# Altium PCB PCB1.PcbDoc
Units mm, origin at the board's own origin, x right, y up, seen from the top; angles counter-clockwise.
Board outline 23 x 13.5 mm, 2 copper layers (L1(Signal), L2(GND)), stack 1.671 mm thick; 13 components, 11 nets, 39 pads, 8 vias.
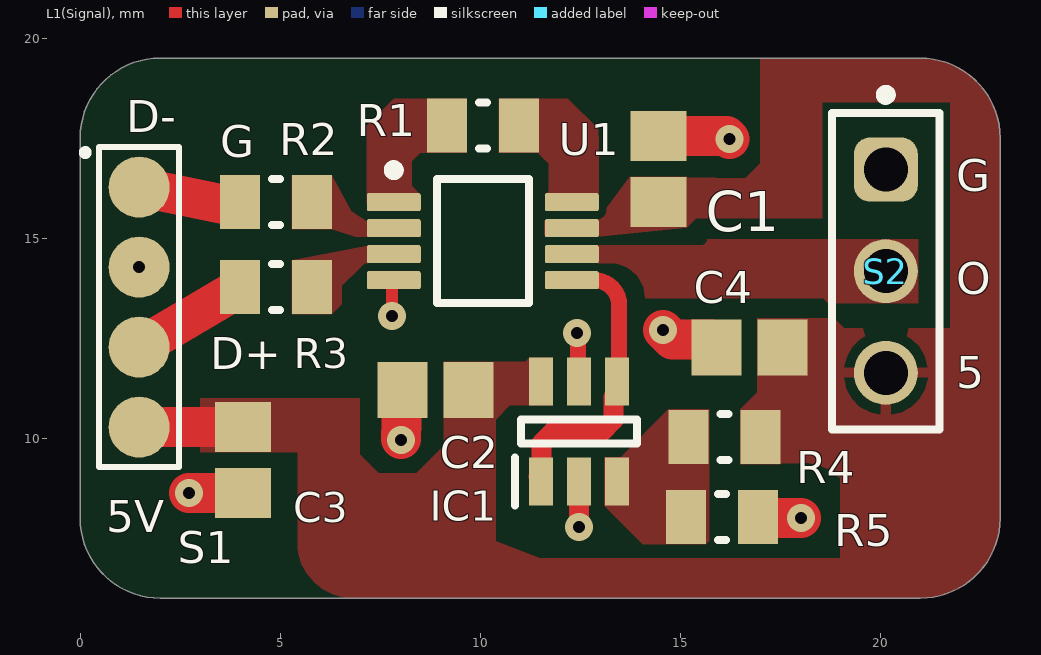
[diagram p0: L1(Signal) view]
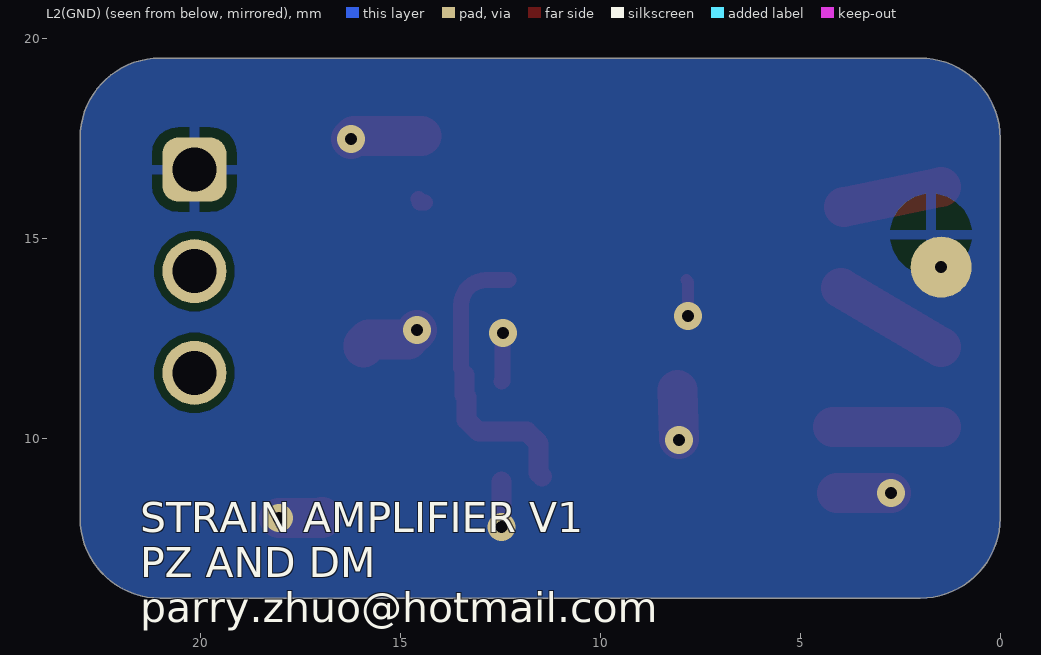
[diagram p1: L2(GND) view, seen from below]
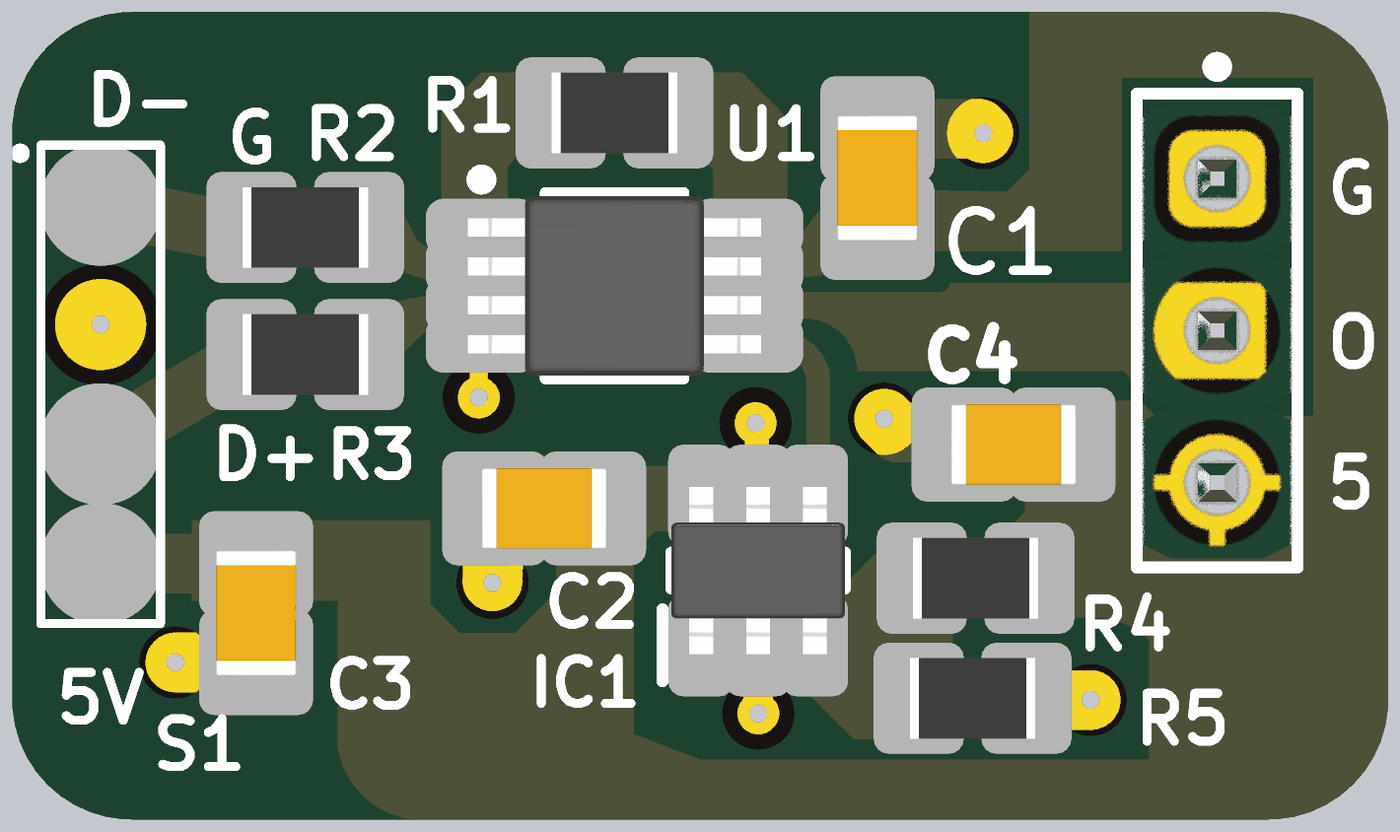
[diagram p2: 3D render of the assembled board from above, using the file's embedded part models]

## Layer stack, top to bottom
Top Solder: solder mask 0.0127, Solder Resist, Dk 3.3
L1(Signal): signal copper 0.0356
Dielectric1: core 1.6002, FR-4, Dk 4.3
L2(GND): signal copper 0.0356
Bottom Solder: solder mask 0.0127, Solder Resist, Dk 3.3

## Board outline
0,17.5 cw(c2,17.5) 2,19.5 21,19.5 cw(c21,17.5) 23,17.5 23,8 cw(c21,8) 21,6 2,6 cw(c2,8) 0,8

## Design rules (kind name [scope] priority, off if disabled: settings)
Clearance [All] p1: gap=0.2 ignorepadtopadclearanceinfootprint=TRUE except(0: Arc-Poly Track-Poly Via-Fill Via-Poly Fill-Fill Fill-Poly Poly-Poly)
DiffPairsRouting [All] p1: maxlimit=0.254 minlimit=0.254 mostfreqgap=0.254 toplayer_minwidth=0.254 toplayer_maxwidth=0.254 toplayer_prefwidth=0.254 bottomlayer_minwidth=0.254 bottomlayer_maxwidth=0.254 bottomlayer_prefwidth=0.254 maxuncoupledlength=12.7
HoleSize [All] p1: absolutevalues=TRUE maxlimit=7.62 minlimit=0.254 maxpercent=80.000 minpercent=20.000
MinimumAnnularRing [All] p1: minimumring=0.2
MinimumSolderMaskSliver [All] p1: minsoldermaskwidth=0.104
PasteMaskExpansion [All] p1: expansion=0.254
PlaneClearance [All] p1: clearance=0.381
PolygonConnect GND_Connection [InNet('GND') vs InNet('GND')] p1: thpad.connectstyle=Relief thpad.reliefconductorwidth=0.254 thpad.reliefentries=4 thpad.polygonreliefangle="90 Angle" thpad.airgapwidth=0.254 smdpad.connectstyle=Direct smdpad.reliefconductorwidth=0.254 smdpad.reliefentries=4 smdpad.polygonreliefangle="90 Angle" smdpad.airgapwidth=0.254 via.connectstyle=Direct via.reliefconductorwidth=0.254 via.reliefentries=4 via.polygonreliefangle="90 Angle" via.airgapwidth=0.254
PolygonConnect 5V_connection [InNet('+5')] p2: thpad.connectstyle=Relief thpad.reliefconductorwidth=0.254 thpad.reliefentries=4 thpad.polygonreliefangle="90 Angle" thpad.airgapwidth=0.254 smdpad.connectstyle=Direct smdpad.reliefconductorwidth=0.254 smdpad.reliefentries=4 smdpad.polygonreliefangle="90 Angle" smdpad.airgapwidth=0.254 via.connectstyle=Direct via.reliefconductorwidth=0.254 via.reliefentries=4 via.polygonreliefangle="90 Angle" via.airgapwidth=0.254
PolygonConnect [All] p3: connectstyle=Direct reliefconductorwidth=0.254 reliefentries=4 polygonreliefangle="90 Angle" airgapwidth=0.254
RoutingVias [All] p1: holewidth=0.5 width=0.7 viastyle="Through Hole" minholewidth=0.3 minwidth=0.5 maxholewidth=1.1 maxwidth=1.3
SMDNeckDown [All] p1: percent=100.000
SilkToSolderMaskClearance SilkscreenOverComponentPads [IsPad] p1: minsilkscreentomaskgap=0.1 clearancetoexposedcopper=TRUE
SolderMaskExpansion [All] p1: expansion=0.254 istentingtop=FALSE
SupplyNets "Schematic Supply Nets_1" [InNet('+5')] p1: voltage=0.000
SupplyNets "Schematic Supply Nets" [InNet('GND')] p2: voltage=0.000
UnRoutedNet [All] p1: checkbadconnections=TRUE
Width [All] p1: maxlimit=1 minlimit=0.2 preferedwidth=0.3 minimp=50.000000 maximp=50.000000 favimp=50.000000
23 further rules are at their usual default settings.

## Components (designator, comment, footprint, x,y, rotation, side; value= is the part's Value field where it differs from the comment)
C1 "0.1uF" CAP_0805 14.461,16.724 r90 top
C2 "0.1uF" CAP_0805 8.89,11.201 r180 top
C3 "0.1uF" CAP_0805 4.075,9.45 r90 top
C4 "0.1uF" CAP_0805 16.739,12.268 r0 top
IC1 "TLV9061SQDBVRQ1" SOT95P280X145-6N 12.468,10.162 r90 top
R1 "1k +-0.1%" RES_0805 10.067,17.814 r180 top
R2 "1K +-0.1%" RES_0805 4.896,15.899 r180 top
R3 "1K +-0.1%" RES_0805 4.896,13.773 r180 top
R4 "200K +-0.1%" RES_0805 16.104,10.033 r0 top
R5 "100K +-0.1%" RES_0805 16.053,8.026 r180 top
S1 "CONN_01X04_StrainGauge" CONN_01X04 1.475,16.275 r0 top
S2 "CONN_01X03_2.54MM" 61300311121 20.142,14.173 r270 top
U1 "INA333AIDGKR" DGK0008A_N 10.067,14.924 r0 top

## Footprints (in the part's own frame and the unit in brackets; to place one, negate y for a bottom-side part, rotate by r counter-clockwise, add the part's x,y. Pads: shape width x height; smd on the part's side, far side on the other; paste and mask are expansions set on the pad)
61300311121 [mm] "Pin Header, pitch 2.54 mm, THT, Vertical, single row, 3p"
  rrect50% 1.6x1.6 hole 1.1: 1(-2.54,0)
  round 1.6 hole 1.1: 2(0,0) 3(2.54,0)
  silkscreen extent -4.53,-1.35 3.96,1.35, body extent -3.81,-1.27 3.81,1.27, height 8.57
CAP_0805 [mm] "Chip Capacitor, 2-Leads, Body 2.00x1.25mm, IPC Medium Density"
  rect 1.25x1.4 smd: 1(-0.825,0) 2(0.825,0)
  body extent -1.05,-0.67 1.05,0.67, height 1.35
CONN_01X04 [mil]
  round 60 smd: 1(0,0) 3(0,-157.48) 4(0,-236.22)
  round 60 hole 11.81: 2(0,-78.74)
  silkscreen extent -54,-276 39,39
DGK0008A_N [mm] "TSOP, 8-Leads, Body 3.1x3.1mm, Pitch 0.65mm, IPC Medium Density"
  rrect22% 1.35x0.45 smd: 1(-2.225,0.975) 2(-2.225,0.325) 3(-2.225,-0.325) 4(-2.225,-0.975) 5(2.225,-0.975) 6(2.225,-0.325) 7(2.225,0.325) 8(2.225,0.975)
  silkscreen extent -2.35,-1.55 1.15,1.9, body extent -2.45,-1.5 2.45,1.5, height 0.94
RES_0805 [mm] "Chip Resistor, 2-Leads, Body 2.00x1.25mm, IPC Medium Density"
  rect 1x1.35 smd: 1(-0.9,0) 2(0.9,0)
  silkscreen extent -0.1,-0.58 0.1,0.58, body extent -1.05,-0.67 1.05,0.67, height 0.6
SOT95P280X145-6N [mm]
  rect 1.2x0.6 smd: 1(-1.25,0.95) 2(-1.25,0) 3(-1.25,-0.95) 4(1.25,-0.95) 5(1.25,0) 6(1.25,0.95)
  silkscreen extent -1.85,-1.45 0.3,1.6, body extent -1.4,-1.45 1.4,1.45, height 1.2

## Part data
C1 C2 C3 C4: library part CAP_0805, "Generic 0805 component", Manufacturer=YAGEO, Manufacturer part number=CC0805JRNPO9BN250, voltage rating=50, Distributor link=https://www.digikey.ca/en/products/detail/yageo/CC0805JRNPO9BN250/5884044
IC1: "Integrated Circuit", Manufacturer_Name="Texas Instruments", Mouser Part Number=595-TLV9061SQDBVRQ1, Arrow Part Number=TLV9061SQDBVRQ1, Arrow Price/Stock=null?region=nac, Datasheet Link=https://www.ti.com/lit/gpn/tlv9061-q1, Height=1.45mm, Manufacturer_Part_Number=TLV9061SQDBVRQ1, Mouser Price/Stock=https://www.mouser.co.uk/ProductDetail/Texas-Instruments/TLV9061SQDBVRQ1?qs=DRkmTr78QASJ%252B5bCrdR4jA%3D%3D
R1 R2 R3: library part RES_0805, "RES_0805", Manufacturer="Stackpole Electronics Inc", Manufacturer part number=RNCS0805BKE1K00, Distributor link=https://www.digikey.ca/en/products/detail/stackpole-electronics-inc/RNCS0805BKE1K00/1800073
R4: library part RES_0805, "RES_0805", Manufacturer="KOA Speer Electronics, Inc.", Manufacturer part number=RN73R2ATTD2003B25, Distributor link=https://www.digikey.ca/en/products/detail/koa-speer-electronics-inc/RN73R2ATTD2003B25/10027580
R5: library part RES_0805, "RES_0805", Manufacturer="Stackpole Electronics Inc", Manufacturer part number=RNCS0805BKE100K, Distributor link=https://www.digikey.ca/en/products/detail/stackpole-electronics-inc/RNCS0805BKE100K/1800066
U1: library part CMP-0944-00088-2, "Low Power, Precision Instrumentation Amplifier, -40 to 125 degC, 8-pin SOP (DGK8), Green (RoHS & no Sb/Br)", Input Bias Current (+/-)(Max)(nA)=0.2, Manufacturer="Texas Instruments", Quiescent Current (+/-)(Typ)(mA)=0.05, CMRR(Min)(dB)=100, Code_JEDEC=MO-187, ComponentLink1Description="Manufacturer URL", ComponentLink1URL=http://www.ti.com/, ComponentLink2Description=Datasheet, ComponentLink2URL=http://www.ti.com/general/docs/lit/getliterature.tsp?genericPartNumber=INA333&fileType=pdf, ComponentLink3Description="Package Specification", ComponentLink3URL=http://www.ti.com/litv/pdf/mpds028d, DatasheetVersion=SBOS445B, Eco-Plan="Green (RoHS & no Sb/Br)", Gain(V/V)="1 to 1000", Input Offset (+/-)(Max)(uV)=25, Input Offset Drift (+/-)(Max)(uV/Degrees Celsius)=0.1, Mounting Technology="Surface Mount", Noise at 1kHz(Typ)(nV/rt(Hz))=50, Number of Channels=1, Output Offset (+/-)(Max)(uV)=75/G, Output Offset Drift (+/-)(Max)(uV/Degrees Celsius)=0.5/G, PackageDescription="8-Pin Thin Small Outline, Body 3 x 3 mm, Pitch 0.65 mm", PackageReference=DGK0008A, PackageVersion="4073329/E, 05/2006", PartNumber=INA333AIDGKR, SubFamily="Single Supply", Vs(Max)(V)=5.5, Vs(Min)(V)=1.8

## Via types
v1: diameter 0.7, hole 0.3, L1(Signal) to L2(GND), 8 vias

## Nets (pads, with @x,y where several pads share a name; then routed paths per layer and width w, separated by ;. In a path a pad name is that pad's centre, name@x,y a point inside that pad or via, vN(x,y) a via of type N, cw(c..) or ccw(c..) an arc to the next point about the centre after c; other vN are vias at no path point)
+5: C1.1 C2.1 C3.2 C4.2 IC1.6 R4.2 S1.4 S2.3 U1.7 | length 2.9
  L1(Signal) w0.4: C1.1@14.376,15.889 C1.1@14.515,15.889 ; C1.1 C1.1@14.538,15.976
  L1(Signal) w1: S1.4 3.875,10.275 C3.2@4.175,10.275
GND: C1.2 C2.2 C3.1 C4.1 IC1.2 IC1.5 R5.1 S1.2 S2.1 U1.4 | length 10.3
  L1(Signal) w0.3: v1(7.798,13.056) 7.798,13.905 U1.4
  L1(Signal) w0.4: v1(12.425,12.625) 12.446,12.604 12.446,11.434 IC1.5
  L1(Signal) w0.5: IC1.2 12.47,8.91 12.47,7.774 v1(12.471,7.772)
  L1(Signal) w1: v1(2.725,8.625) C3.1 ; v1@8.026,9.982 C2.2 ; C1.2 16.157,17.549 v1(16.231,17.475) ; v1(14.575,12.7) 14.807,12.468 15.789,12.468 15.914,12.343 C4.1 ; R5.1 16.953,7.997 v1(18.027,7.997)
  other v1: 8.026,9.957
NetIC1_1: IC1.1 IC1.4 U1.5 | length 7.2
  L1(Signal) w0.4: U1.5 12.851,13.949 cw(c12.851,13.325) 13.475,13.325 IC1.4@13.475,11.75
  L1(Signal) w0.5: IC1.1@11.455,9.042 11.535,9.122 11.535,9.869 11.828,10.162 13.042,10.162 13.335,10.455 13.335,11.029 13.385,11.079 IC1.4@13.385,11.584
NetIC1_3: IC1.3 R4.1 R5.2
NetR1_1: R1.1 U1.8
NetR1_2: R1.2 U1.1
NetR2_1: R2.1 U1.2
NetR3_1: R3.1 U1.3
NetS2_2: S2.2 U1.6
strainAIN_D+: R3.2 S1.3 | length 2.9
  L1(Signal) w1: S1.3 R3.2@3.975,13.75
strainAIN_D-: R2.2 S1.1 | length 2.5
  L1(Signal) w1: S1.1 R2.2@3.9,15.775

## Polygon pours and split planes (outlines as drawn)
+5 on L1(Signal) "+5_L01_P099" (solid, pour order 99): 3,9.652 3,11 6.985,11 6.985,9.601 7.468,9.119 8.407,9.119 9.093,9.804 9.093,11.913 11.125,11.913 11.227,12.014 11.811,12.014 11.811,10.82 10.744,10.82 10.389,10.465 10.389,7.214 5.486,7.214 5.436,7.163 5.436,9.652
NetS2_2 on L1(Signal) "NETS2_2_L01_P108" (solid, pour order 108): 11.625,14.4 ccw(c11.65,14.4) 11.65,14.375 13.25,14.375 cw(c13.25,13.5) 14.125,13.5 18.575,13.5 18.7,13.375 20.95,13.375 20.95,14.975 15.675,14.975 cw(c15.525,14.975) 15.525,14.825 11.65,14.825 ccw(c11.65,14.8) 11.625,14.8
+5 on L1(Signal) "+5_L01_P105" (solid, pour order 105): 23,12.256 23,8 cw(c21,8) 21,6 7.01,6 cw(c6.86,7.425) 5.435,7.275 10.4,7.425 11.5,7 19,7 19,9 ccw(c18.095,8.095) 18.095,9.375 16.75,9.375
+5 on L1(Signal) "+5_L01_P104" (solid, pour order 104): 16.5,9.35 16.5,10.725 16.925,11.15 16.925,13 18.85,13 19.125,12.725 19.125,10.025 18.175,10.025 17.5,9.35
+5 on L1(Signal) "+5_L01_P103" (solid, pour order 103): 13.75,16.525 15.15,16.525 16.625,16.5 17,16.875 17,19.5 21,19.5 cw(c21,17.5) 23,17.5 23,10 18.5,10 18.5,12.75 21.725,12.75 21.75,12.775 21.75,18.4 18.575,18.4 18.55,18.375 18.55,15.5 15.4,15.5 15.175,15.275 13.725,15.275
+5 on L1(Signal) "+5_L01_P101" (solid, pour order 101): 11.608,15.011 12.929,15.011 ccw(c12.929,15.037) 12.954,15.037 15.164,15.265 15.164,16.535 13.741,16.535 12.954,15.469 11.608,15.494
NetIC1_3 on L1(Signal) "NETIC1_3_L01_P098" (solid, pour order 98): 13.106,9.525 13.513,9.525 14.707,10.719 15.723,10.719 15.723,7.417 15.646,7.341 14.072,7.341 13.106,8.306
NetR1_2 on L1(Signal) "NETR1_2_L01_P000" (solid, pour order 0): 7.167,15.723 7.216,15.674 8.467,15.674 8.517,15.723 8.517,16.074 8.285,16.306 8.285,16.924 8.5,17.139 9.667,17.139 9.667,18.489 7.842,18.489 7.167,17.814 7.167,15.899
NetR1_1 on L1(Signal) "NETR1_1_L01_P001" (solid, pour order 1): 11.631,15.688 11.646,15.674 12.917,15.674 12.967,15.723 12.967,17.534 12.952,17.549 12.952,17.733 12.196,18.489 10.467,18.489 10.467,17.139 11.467,17.139 11.467,17.114 11.717,16.864 11.717,16.174 11.617,16.074 11.631,16.06 11.631,15.688 12.952,15.688 12.967,15.703 12.967,15.723
NetR2_1 on L1(Signal) "NETR2_1_L01_P015" (solid, pour order 15): 8.517,15.424 8.517,15.037 6.883,15.037 6.296,15.224 5.296,15.224 5.296,16.574 6.296,16.574 6.776,15.674 7.167,15.424 7.216,15.474 8.467,15.474
NetR3_1 on L1(Signal) "NETR3_1_L01_P018" (solid, pour order 18): 5.296,13.098 6.296,13.098 6.546,13.348 6.546,13.803 7.117,14.374 7.216,14.374 7.231,14.388 8.502,14.388 8.502,14.76 8.517,14.774 8.467,14.824 8.453,14.81 7.181,14.81 7.167,14.795 7.181,14.81 5.296,14.448
GND on L2(GND) "GND_L02_P109" (solid, pour order 109): 0,17.5 cw(c2,17.5) 2,19.5 21,19.5 cw(c21,17.5) 23,17.5 23,8 cw(c21,8) 21,6 2,6 cw(c2,8) 0,8

## Silkscreen, mask and mechanical layers (free items; w line width, h text height)
Top Overlay:
  text "D-" at 1.15,17.65 h0.8
  text "G" at 3.503,17.016 h0.8
  text "G" at 21.9,16.175 h0.8
  text "O" at 21.9,13.6 h0.8
  text "D+" at 3.25,11.725 h0.8
  text "5" at 21.9,11.25 h0.8
  text "5V" at 0.65,7.65 h0.8
Bottom Overlay:
  text "STRAIN AMPLIFIER V1 / PZ AND DM / parry.zhuo@hotmail.com" at 21.5,5.4 h0.75